# EAGLE board ir_receiver (EAGLE 4.16)
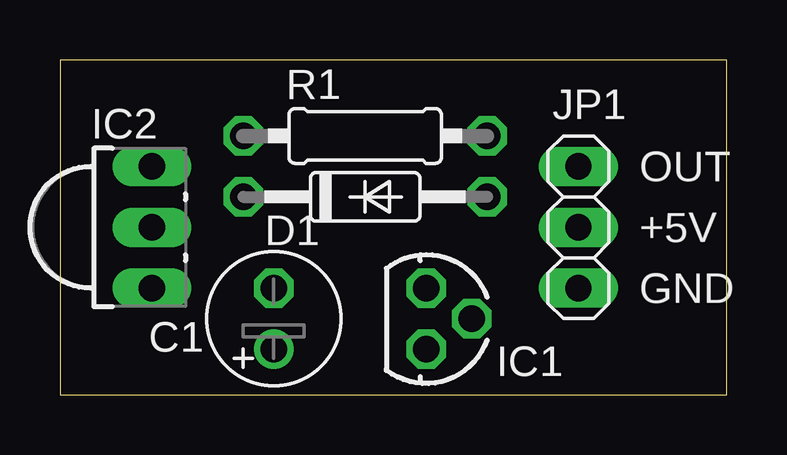
[diagram p0: board, top side]
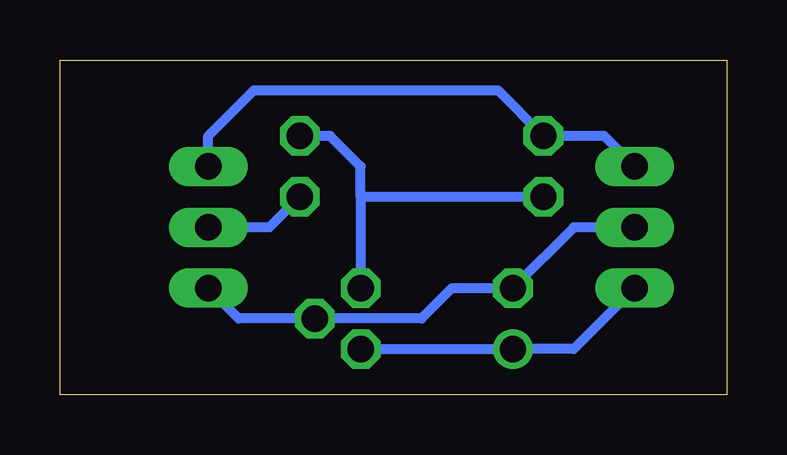
[diagram p1: board, bottom side, seen from below]

Size 27.8 x 13.96 mm. Coordinates in mm from the lower left corner, seen from the top.
Outline: 0,0 27.8,0 27.8,13.96 0,13.96 0,0
Copper layers (1*16): Top 0.035mm / dielectric 1.5mm / Bottom 0.035mm
Design rules "default": minimum track width 10mil, minimum drill 24mil, track to track 8mil, track to pad 8mil, pad to pad 8mil, via to via 8mil, smd to smd 8mil, copper to edge 40mil, drill to drill 8mil, minimum pad ring 10mil, minimum via ring 8mil, stop-mask expansion 4mil, vias tented up to drill 0mil, thermal gap 10mil

## Footprints (pad centres in the part's own frame; a part is rotated, then mirrored left to right if it is on the bottom)
E2,5-6 = drill 1.1 round: + -1.27,0 | drill 1.1 pad 1.6 octagon: - 1.27,0
DO35-10 = drill 1.1 octagon: A 5.08,0; C -5.08,0
78LXX = drill 1.1 octagon: GND 0,1.905; IN 1.27,0; OUT -1.27,0
PHSC38 = drill 1.1 long: 1 -2.54,0; 2 0,0; 3 2.54,0
1X03 = drill 1.1 long: 1 -2.54,0; 2 0,0; 3 2.54,0
0207/10 = drill 1.1 octagon: 1 -5.08,0; 2 5.08,0

## Placement (x,y rotation side)
C1  4.7uF  [E2,5-6]  8.92,3.17 90 top
D1  1N4148  [DO35-10]  12.73,8.25 0 top
IC1  78L05  [78LXX]  15.27,3.17 270 top
IC2  PHSC38  [PHSC38]  3.84,6.98 270 top
JP1  [1X03]  21.62,6.98 270 top
R1  4.7K  [0207/10]  12.73,10.79 180 top

## Library data of the parts
C1 D1 IC1 IC2 JP1 R1 = ir_serial

## Nets
+5V: C1.+ IC1.IN IC2.3
GND: C1.- IC1.GND IC2.2 JP1.3
N$1: D1.A JP1.2
N$2: D1.C IC1.OUT R1.1
N$3: IC2.1 JP1.1 R1.2

## Tracks (layer width: path | path; a pad name or v marks a point on that pad's centre or on a via)
+5V
  Bottom 0.406: IC2.3 6.38,1.9 C1.+ IC1.IN
GND
  Bottom 0.406: 16.54,3.17 12.73,3.17 11.46,4.44 C1.- 6.38,6.98 IC2.2 | 16.54,3.17 IC1.GND | 16.54,3.17 20.35,3.17 JP1.3
N$1
  Bottom 0.406: D1.A 19.08,6.98 JP1.2
N$2
  Bottom 0.406: R1.1 16.54,10.79 15.27,9.52 15.27,8.25 | 15.27,8.25 IC1.OUT | D1.C 15.27,8.25
N$3
  Bottom 0.406: IC2.1 5.11,10.79 R1.2 9.55,12.69 19.71,12.69 21.62,10.79 JP1.1

## Text on the board
tPlace: OUT | +5V | GND